# Altium PCB SPT3G_LCBoard.PcbDoc
Units mil, origin at the board's own origin, x right, y up, seen from the top; angles counter-clockwise.
Board outline 6750 x 1969 mil, 6 copper layers (Top Layer, Signal Layer 1, Internal Plane 1, Internal Plane 2, Signal Layer 2, Bottom Layer), stack 48.468 mil thick; 44 components, 140 nets, 688 pads, 138 vias.
Unrouted connection lines stored in the file: 204.
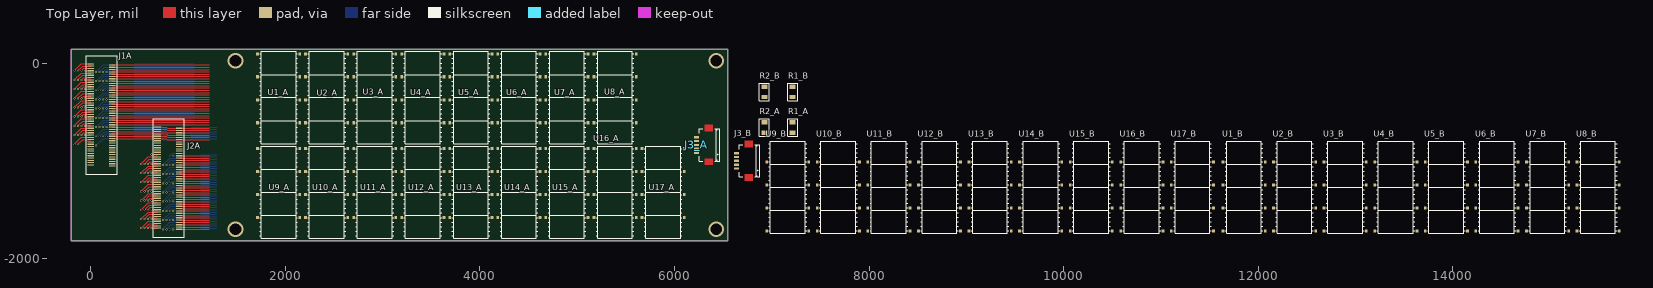
[diagram p0: Top Layer view]
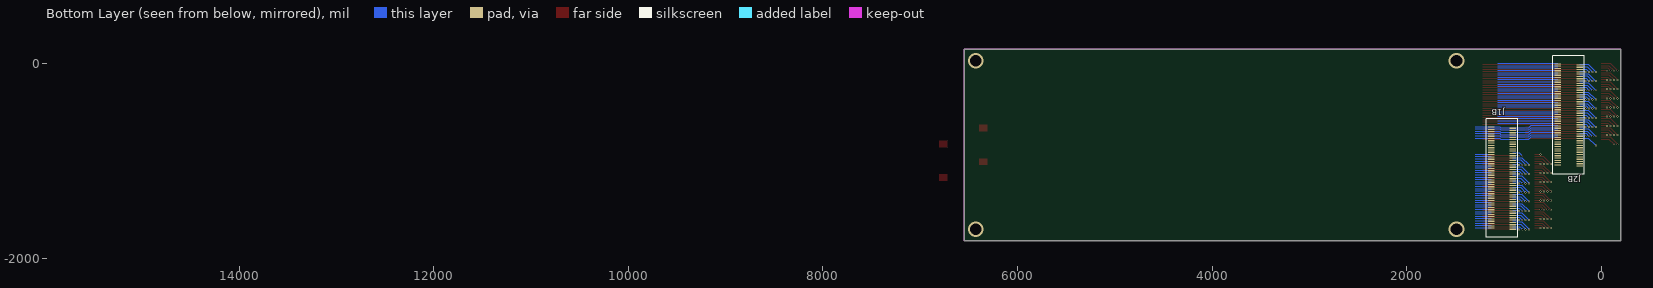
[diagram p1: Bottom Layer view, seen from below]
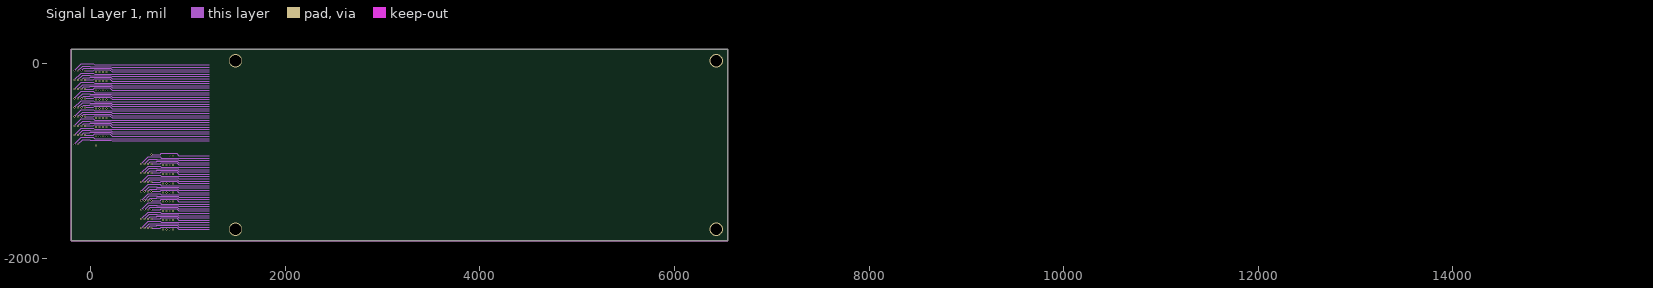
[diagram p2: Signal Layer 1]
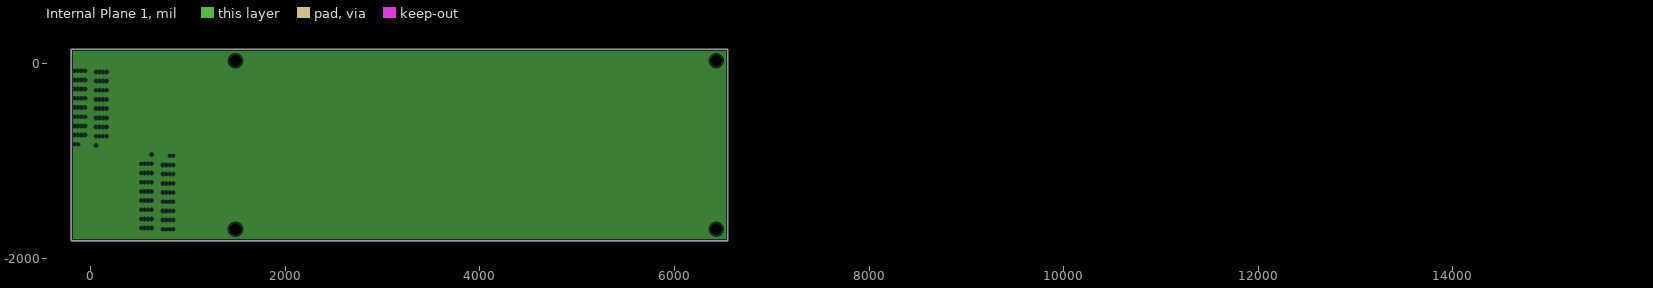
[diagram p3: Internal Plane 1, clearances drawn from the general rule]
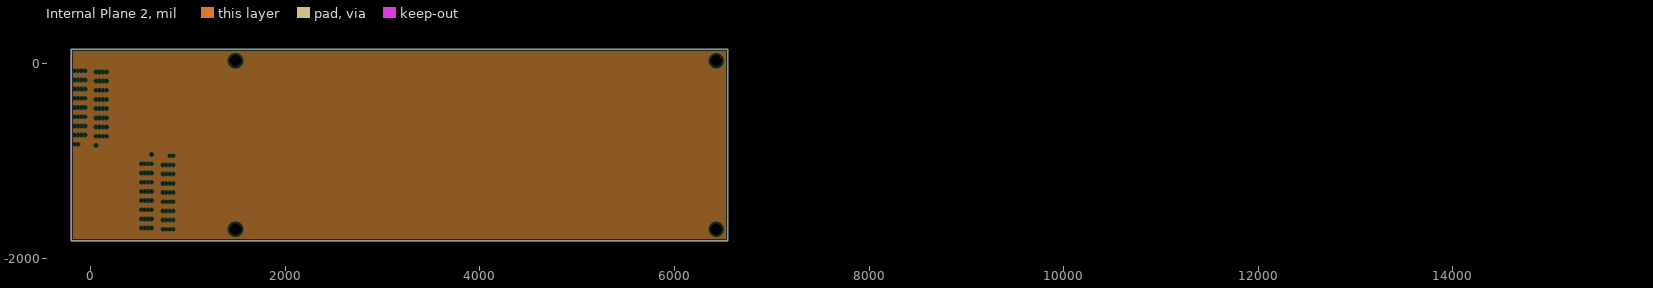
[diagram p4: Internal Plane 2, clearances drawn from the general rule]
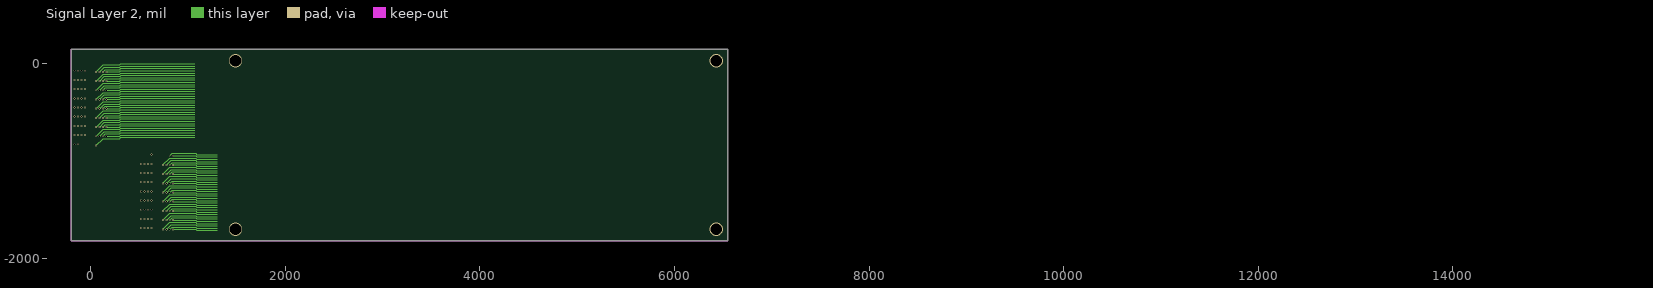
[diagram p5: Signal Layer 2]

## Layer stack, top to bottom
Top Solder: solder mask 0.4, Solder Resist, Dk 3.5
Top Layer: signal copper 1.4
Dielectric 1: core 10, FR-4, Dk 4.2
Signal Layer 1: signal copper 1.417
Dielectric 3: prepreg 5, Dk 4.2
Internal Plane 1: plane copper 1.417
Dielectric 4: core 10, Dk 4.2
Internal Plane 2: plane copper 1.417
Dielectric 5: prepreg 5, Dk 4.2
Signal Layer 2: signal copper 1.417
Dielectric 2: core 10, Dk 4.2
Bottom Layer: signal copper 1.4
Bottom Solder: solder mask 0.4, Solder Resist, Dk 3.5

## Board outline
-201.1,-1818.5 -201.1,150.5 6548.9,150.5 6548.9,-1818.5

## Design rules (kind name [scope] priority, off if disabled: settings)
Clearance [All] p1: gap=6
PlaneClearance [All] p1: clearance=20
PlaneConnect [All] p1: planeconnectstyle=Relief reliefexpansion=20 reliefentries=4 reliefconductorwidth=10 reliefairgap=10
PolygonConnect [All] p1: connectstyle=Relief reliefconductorwidth=10 reliefentries=4 polygonreliefangle="90 Angle" airgapwidth=10
RoomDefinition B [InComponentClass('B')] p1: confinementstyle=ConfineIn formatcopy=TRUE lockcomponents=FALSE outline 6593.9,-1758.72 15733.9,-1758.72 15733.9,-666.2 6593.9,-666.2
RoutingVias [All] p1: holewidth=28 width=50 viastyle="Through Hole" minholewidth=28 minwidth=50 maxholewidth=28 maxwidth=50
SolderMaskExpansion [All] p1: expansion=4
UnpouredPolygon [All] p1: allowunpoured=FALSE
Width [All] p1: maxlimit=10 minlimit=5 preferedwidth=6
27 further rules are at their usual default settings.

## Classes and differential pairs
component class A: J3_A R1_A R2_A U1_A U2_A U3_A U4_A U5_A U6_A U7_A U8_A U9_A U10_A U11_A U12_A U13_A U14_A U15_A U16_A U17_A
component class B: J3_B R1_B R2_B U1_B U2_B U3_B U4_B U5_B U6_B U7_B U8_B U9_B U10_B U11_B U12_B U13_B U14_B U15_B U16_B U17_B
component class S1: J1A J2A
component class S2: J1B J2B
channel class LCs: A B

## Components (designator, comment, footprint, x,y, rotation, side; value= is the part's Value field where it differs from the comment)
J1A "ZIF Connector" LCBoard_ZIFCon#1 33.46,0 r270 top
J1B "ZIF Connector" LCBoard_ZIFCon#2 941.89,-1700.79 r90 bottom
J2A "ZIF Connector" LCBoard_ZIFCon#1 719.45,-649.61 r270 top
J2B "ZIF Connector" LCBoard_ZIFCon#2 255.91,-1051.18 r90 bottom
J3_A "FH-12-5S-1SH(55)" FH-12-5S-1SH(55) 6352.9,-833.5 r90 top (schematic designator J3)
J3_B "FH-12-5S-1SH(55)" FH-12-5S-1SH(55) 6763.9,-996.91 r90 top (schematic designator J3)
R1_A "Res1206" 1206 7213.9,-706.47 r90 top (schematic designator R1)
R1_B "Res1206" 1206 7213.9,-341.47 r90 top (schematic designator R1)
R2_A "Res1206" 1206 6923.9,-706.47 r90 top (schematic designator R2)
R2_B "Res1206" 1206 6923.9,-341.47 r90 top (schematic designator R2)
U1_A "LC_wafer" "LCCHIP4X2 - BondPads1" 1930.9,-345.91 r270 top (schematic designator U1)
U1_B "LC_wafer" "LCCHIP4X2 - BondPads1" 11853.9,-1268.56 r90 top (schematic designator U1)
U2_A "LC_wafer" "LCCHIP4X2 - BondPads1" 2424.9,-345.91 r270 top (schematic designator U2)
U2_B "LC_wafer" "LCCHIP4X2 - BondPads1" 12373.9,-1268.56 r90 top (schematic designator U2)
U3_A "LC_wafer" "LCCHIP4X2 - BondPads1" 2918.9,-345.91 r270 top (schematic designator U3)
U3_B "LC_wafer" "LCCHIP4X2 - BondPads1" 12893.9,-1268.56 r90 top (schematic designator U3)
U4_A "LC_wafer" "LCCHIP4X2 - BondPads1" 3412.9,-345.91 r270 top (schematic designator U4)
U4_B "LC_wafer" "LCCHIP4X2 - BondPads1" 13413.9,-1268.56 r90 top (schematic designator U4)
U5_A "LC_wafer" "LCCHIP4X2 - BondPads1" 3906.9,-345.91 r270 top (schematic designator U5)
U5_B "LC_wafer" "LCCHIP4X2 - BondPads1" 13933.9,-1268.56 r90 top (schematic designator U5)
U6_A "LC_wafer" "LCCHIP4X2 - BondPads1" 4400.9,-345.91 r270 top (schematic designator U6)
U6_B "LC_wafer" "LCCHIP4X2 - BondPads1" 14453.9,-1268.56 r90 top (schematic designator U6)
U7_A "LC_wafer" "LCCHIP4X2 - BondPads1" 4894.9,-345.91 r270 top (schematic designator U7)
U7_B "LC_wafer" "LCCHIP4X2 - BondPads1" 14973.9,-1268.56 r90 top (schematic designator U7)
U8_A "LC_wafer" "LCCHIP4X2 - BondPads1" 5388.9,-345.91 r270 top (schematic designator U8)
U8_B "LC_wafer" "LCCHIP4X2 - BondPads1" 15493.9,-1268.56 r90 top (schematic designator U8)
U9_A "LC_wafer" "LCCHIP4X2 - BondPads1" 1930.9,-1319.5 r270 top (schematic designator U9)
U9_B "LC_wafer" "LCCHIP4X2 - BondPads1" 7163.9,-1268.56 r90 top (schematic designator U9)
U10_A "LC_wafer" "LCCHIP4X2 - BondPads1" 2424.9,-1319.5 r270 top (schematic designator U10)
U10_B "LC_wafer" "LCCHIP4X2 - BondPads1" 7683.9,-1268.56 r90 top (schematic designator U10)
U11_A "LC_wafer" "LCCHIP4X2 - BondPads1" 2918.9,-1319.5 r270 top (schematic designator U11)
U11_B "LC_wafer" "LCCHIP4X2 - BondPads1" 8203.9,-1268.56 r90 top (schematic designator U11)
U12_A "LC_wafer" "LCCHIP4X2 - BondPads1" 3412.9,-1319.5 r270 top (schematic designator U12)
U12_B "LC_wafer" "LCCHIP4X2 - BondPads1" 8723.9,-1268.56 r90 top (schematic designator U12)
U13_A "LC_wafer" "LCCHIP4X2 - BondPads1" 3906.9,-1319.5 r270 top (schematic designator U13)
U13_B "LC_wafer" "LCCHIP4X2 - BondPads1" 9243.9,-1268.56 r90 top (schematic designator U13)
U14_A "LC_wafer" "LCCHIP4X2 - BondPads1" 4400.9,-1319.5 r270 top (schematic designator U14)
U14_B "LC_wafer" "LCCHIP4X2 - BondPads1" 9763.9,-1268.56 r90 top (schematic designator U14)
U15_A "LC_wafer" "LCCHIP4X2 - BondPads1" 4894.9,-1319.5 r270 top (schematic designator U15)
U15_B "LC_wafer" "LCCHIP4X2 - BondPads1" 10283.9,-1268.56 r90 top (schematic designator U15)
U16_A "LC_wafer" "LCCHIP4X2 - BondPads1" 5388.9,-1319.5 r270 top (schematic designator U16)
U16_B "LC_wafer" "LCCHIP4X2 - BondPads1" 10803.9,-1268.56 r90 top (schematic designator U16)
U17_A "LC_wafer" "LCCHIP4X2 - BondPads1" 5882.9,-1319.5 r270 top (schematic designator U17)
U17_B "LC_wafer" "LCCHIP4X2 - BondPads1" 11323.9,-1268.56 r90 top (schematic designator U17)

## Footprints (in the part's own frame and the unit in brackets; to place one, negate y for a bottom-side part, rotate by r counter-clockwise, add the part's x,y. Pads: shape width x height; smd on the part's side, far side on the other; paste and mask are expansions set on the pad)
1206 [mil]
  rect 45x60 smd: 1(0,0) 2(105,0)
  silkscreen extent -37,-51 144,51
FH-12-5S-1SH(55) [mil] "FH-12-5S-1SH(55)"
  rect 24x52 smd: 1(79,128) 2(40,128) 3(0,128) 4(-39.37,128) 5(-78.74,128)
  Top Layer region: 209,44 138,44 138,-43.31 209,-43.31
  Top Layer region: -137.8,44 -208.66,44 -208.66,-43.31 -137.8,-43.31
  silkscreen extent -165,-114 166,99
LCBoard_ZIFCon#1 [mm]
  rect 0.3x1.7 smd: 1(0,-0.85) 2(0.3,4.8) 3(0.6,-0.85) 4(0.9,4.8) 5(1.2,-0.85) 6(1.5,4.8) 7(1.8,-0.85) 8(2.1,4.8) 9(2.4,-0.85) 10(2.7,4.8) 11(3,-0.85) 12(3.3,4.8) 13(3.6,-0.85) 14(3.9,4.8) 15(4.2,-0.85) 16(4.5,4.8) 17(4.8,-0.85) 18(5.1,4.8) 19(5.4,-0.85) 20(5.7,4.8) 21(6,-0.85) 22(6.3,4.8) 23(6.6,-0.85) 24(6.9,4.8) 25(7.2,-0.85) 26(7.5,4.8) 27(7.8,-0.85) 28(8.1,4.8) 29(8.4,-0.85) 30(8.7,4.8) 31(9,-0.85) 32(9.3,4.8) 33(9.6,-0.85) 34(9.9,4.8) 35(10.2,-0.85) 36(10.5,4.8) 37(10.8,-0.85) 38(11.1,4.8) 39(11.4,-0.85) 40(11.7,4.8) 41(12,-0.85) 42(12.3,4.8) 43(12.6,-0.85) 44(12.9,4.8) 45(13.2,-0.85) 46(13.5,4.8) 47(13.8,-0.85) 48(14.1,4.8) 49(14.4,-0.85) 50(14.7,4.8) 51(15,-0.85) 52(15.3,4.8) 53(15.6,-0.85) 54(15.9,4.8) 55(16.2,-0.85) 56(16.5,4.8) 57(16.8,-0.85) 58(17.1,4.8) 59(17.4,-0.85) 60(17.7,4.8) 61(18,-0.85) 62(18.3,4.8) 63(18.6,-0.85) 64(18.9,4.8) 65(19.2,-0.85) 66(19.5,4.8) 67(19.8,-0.85) 68(20.1,4.8) 69(20.4,-0.85) 70(20.7,4.8) 71(21,-0.85) 72(21.3,4.8) 73(21.6,-0.85) 74(21.9,4.8) 75(22.2,-0.85) 76(22.5,4.8) 77(22.8,-0.85) 78(23.1,4.8) 79(23.4,-0.85) 80(23.7,4.8) 81(24,-0.85) 82(24.3,4.8) 83(24.6,-0.85) 84(24.9,4.8) 85(25.2,-0.85) 86(25.5,4.8) 87(25.8,-0.85) 88(26.1,4.8) 89(26.4,-0.85) 90(26.7,4.8)
  round 0.5 on Top Overlay: 2(-2.3,-2.4)
  silkscreen extent -2.1,-2.1 28.8,6.1
LCBoard_ZIFCon#2 [mm]
  rect 0.3x1.7 smd: 1(0,-0.85) 2(0.3,4.8) 3(0.6,-0.85) 4(0.9,4.8) 5(1.2,-0.85) 6(1.5,4.8) 7(1.8,-0.85) 8(2.1,4.8) 9(2.4,-0.85) 10(2.7,4.8) 11(3,-0.85) 12(3.3,4.8) 13(3.6,-0.85) 14(3.9,4.8) 15(4.2,-0.85) 16(4.5,4.8) 17(4.8,-0.85) 18(5.1,4.8) 19(5.4,-0.85) 20(5.7,4.8) 21(6,-0.85) 22(6.3,4.8) 23(6.6,-0.85) 24(6.9,4.8) 25(7.2,-0.85) 26(7.5,4.8) 27(7.8,-0.85) 28(8.1,4.8) 29(8.4,-0.85) 30(8.7,4.8) 31(9,-0.85) 32(9.3,4.8) 33(9.6,-0.85) 34(9.9,4.8) 35(10.2,-0.85) 36(10.5,4.8) 37(10.8,-0.85) 38(11.1,4.8) 39(11.4,-0.85) 40(11.7,4.8) 41(12,-0.85) 42(12.3,4.8) 43(12.6,-0.85) 44(12.9,4.8) 45(13.2,-0.85) 46(13.5,4.8) 47(13.8,-0.85) 48(14.1,4.8) 49(14.4,-0.85) 50(14.7,4.8) 51(15,-0.85) 52(15.3,4.8) 53(15.6,-0.85) 54(15.9,4.8) 55(16.2,-0.85) 56(16.5,4.8) 57(16.8,-0.85) 58(17.1,4.8) 59(17.4,-0.85) 60(17.7,4.8) 61(18,-0.85) 62(18.3,4.8) 63(18.6,-0.85) 64(18.9,4.8) 65(19.2,-0.85) 66(19.5,4.8) 67(19.8,-0.85) 68(20.1,4.8) 69(20.4,-0.85) 70(20.7,4.8) 71(21,-0.85) 72(21.3,4.8) 73(21.6,-0.85) 74(21.9,4.8) 75(22.2,-0.85) 76(22.5,4.8) 77(22.8,-0.85) 78(23.1,4.8) 79(23.4,-0.85) 80(23.7,4.8) 81(24,-0.85) 82(24.3,4.8) 83(24.6,-0.85) 84(24.9,4.8) 85(25.2,-0.85) 86(25.5,4.8) 87(25.8,-0.85) 88(26.1,4.8) 89(26.4,-0.85) 90(26.7,4.8)
  round 0.5 on Bottom Overlay: 2(-2.3,-2.4)
  silkscreen extent -2.1,-2.1 28.8,6.1
"LCCHIP4X2 - BondPads1" [mil] "LCCHIP4X2"
  round 20 on Top Overlay: 0(-474.41,-178.15)
  rect 32x28 smd: 1(-448.82,-216.9) 2(-212.6,-216.9) 3(24,-216.9) 4(260,-216.9) 5(260,217) 6(24,217) 7(-212.6,217) 8(-448.82,217)
  silkscreen extent -474,-194 475,194

## Part data
J1A J1B J2A J2B: library part LCboard_FH16-90S-0.3SHW(05)
R1_A R1_B R2_A R2_B: "Resistor"
U1_A U1_B U2_A U2_B U3_A U3_B U4_A U4_B U5_A U5_B U6_A U6_B U7_A U7_B U8_A U8_B U9_A U9_B U10_A U10_B U11_A U11_B U12_A U12_B U13_A U13_B U14_A U14_B U15_A U15_B U16_A U16_B U17_A U17_B: library part LCWafer, "Gold bonded integrated LC"

## Via types
v1: diameter 20, hole 10, Top Layer to Bottom Layer, 134 vias
v2: diameter 160/136/136/160 (per signal layer), hole 120, Top Layer to Bottom Layer, 4 vias

## Nets (pads, with @x,y where several pads share a name; then routed paths per layer and width w, separated by ;. In a path a pad name is that pad's centre, name@x,y a point inside that pad or via, vN(x,y) a via of type N, cw(c..) or ccw(c..) an arc to the next point about the centre after c; other vN are vias at no path point)
BOLORETURN_A: J1A.1 J1A.3 J1A.5 J1A.7 J1A.9 J1A.11 J1A.13 J1A.15 J1A.17 J1A.19 J1A.21 J1A.23 J1A.25 J1A.27 J1A.29 J1A.31 J1A.33 J1A.35 J1A.37 J1A.39 J1A.41 J1A.43 J1A.45 J1A.47 J1A.49 J1A.51 J1A.53 J1A.55 J1A.57 J1A.59 J1A.61 J1A.63 J1A.65 J2A.25 J2A.27 J2A.29 J2A.31 J2A.33 J2A.35 J2A.37 J2A.39 J2A.41 J2A.43 J2A.45 J2A.47 J2A.49 J2A.51 J2A.53 J2A.55 J2A.57 J2A.59 J2A.61 J2A.63 J2A.65 J2A.67 J2A.69 J2A.71 J2A.73 J2A.75 J2A.77 J2A.79 J2A.81 J2A.83 J2A.85 J2A.87 J2A.89 J3_A.2 R1_A.2 R2_A.2 | length 75432.1
  Top Layer w6: v1(-167.32,-826.77) -96.46,-755.91 J1A.65 ; v1(-167.32,-732.28) -96.46,-661.42 J1A.57 ; v1(-167.32,-637.8) -96.46,-566.93 J1A.49 ; v1(-167.32,-543.31) -96.46,-472.44 J1A.41 ; v1(-167.32,-448.82) -96.46,-377.95 J1A.33 ; v1(-167.32,-354.33) -96.46,-283.46 J1A.25 ; v1(-167.32,-259.84) -96.46,-188.98 J1A.17 ; v1(-167.32,-165.35) -96.46,-94.49 J1A.9 ; v1(-167.32,-70.87) -96.46,0 J1A.1 ; v1(-131.89,-732.28) -84.65,-685.04 J1A.59 ; v1(-131.89,-637.8) -84.65,-590.55 J1A.51 ; v1(-131.89,-543.31) -84.65,-496.06 J1A.43 ; v1(-131.89,-448.82) -84.65,-401.57 J1A.35 ; v1(-131.89,-354.33) -84.65,-307.09 J1A.27 ; v1(-131.89,-259.84) -84.65,-212.6 J1A.19 ; v1(-131.89,-165.35) -84.65,-118.11 J1A.11 ; v1(-131.89,-70.87) -84.65,-23.62 J1A.3 ; v1(-96.46,-732.28) -72.83,-708.66 J1A.61 ; v1(-96.46,-637.8) -72.83,-614.17 J1A.53 ; v1(-96.46,-543.31) -72.83,-519.69 J1A.45 ; v1(-96.46,-448.82) -72.83,-425.2 J1A.37 ; v1(-96.46,-354.33) -72.83,-330.71 J1A.29 ; v1(-96.46,-259.84) -72.83,-236.22 J1A.21 ; v1(-96.46,-165.35) -72.83,-141.73 J1A.13 ; v1(-96.46,-70.87) -72.83,-47.24 J1A.5 ; v1(-61.02,-732.28) J1A.63 ; v1(-61.02,-637.8) J1A.55 ; v1(-61.02,-543.31) J1A.47 ; v1(-61.02,-448.82) J1A.39 ; v1(-61.02,-354.33) J1A.31 ; v1(-61.02,-259.84) J1A.23 ; v1(-61.02,-165.35) J1A.15 ; v1(-61.02,-70.87) J1A.7 ; v1(518.66,-1688.98) 589.53,-1618.11 J2A.83 ; v1(518.66,-1594.49) 589.53,-1523.62 J2A.75 ; v1(518.66,-1500) 589.53,-1429.13 J2A.67 ; v1(518.66,-1405.51) 589.53,-1334.65 J2A.59 ; v1(518.66,-1311.02) 589.53,-1240.16 J2A.51 ; v1(518.66,-1216.54) 589.53,-1145.67 J2A.43 ; v1(518.66,-1122.05) 589.53,-1051.18 J2A.35 ; v1(518.66,-1027.56) 589.53,-956.69 J2A.27 ; v1(554.09,-1688.98) 601.34,-1641.73 J2A.85 ; v1(554.09,-1594.49) 601.34,-1547.24 J2A.77 ; v1(554.09,-1500) 601.34,-1452.76 J2A.69 ; v1(554.09,-1405.51) 601.34,-1358.27 J2A.61 ; v1(554.09,-1311.02) 601.34,-1263.78 J2A.53 ; v1(554.09,-1216.54) 601.34,-1169.29 J2A.45 ; v1(554.09,-1122.05) 601.34,-1074.8 J2A.37 ; v1(554.09,-1027.56) 601.34,-980.31 J2A.29 ; v1(589.53,-1688.98) 613.15,-1665.35 J2A.87 ; v1(589.53,-1594.49) 613.15,-1570.87 J2A.79 ; v1(589.53,-1500) 613.15,-1476.38 J2A.71 ; v1(589.53,-1405.51) 613.15,-1381.89 J2A.63 ; v1(589.53,-1311.02) 613.15,-1287.4 J2A.55 ; v1(589.53,-1216.54) 613.15,-1192.91 J2A.47 ; v1(589.53,-1122.05) 613.15,-1098.43 J2A.39 ; v1(589.53,-1027.56) 613.15,-1003.94 J2A.31 ; v1(624.96,-1688.98) J2A.89 ; v1(624.96,-1594.49) J2A.81 ; v1(624.96,-1500) J2A.73 ; v1(624.96,-1405.51) J2A.65 ; v1(624.96,-1311.02) J2A.57 ; v1(624.96,-1216.54) J2A.49 ; v1(624.96,-1122.05) J2A.41 ; v1(624.96,-1027.56) J2A.33 ; v1(624.96,-933.07) J2A.25
  Signal Layer 1 w6: v1(-167.32,-826.77) -96.46,-755.91 28.19,-755.91 40,-767.72 1220,-767.72 ; v1(-167.32,-732.28) -96.46,-661.42 28.19,-661.42 40,-673.23 1220,-673.23 ; v1(-167.32,-637.8) -96.46,-566.93 28.19,-566.93 40,-578.74 1220,-578.74 ; v1(-167.32,-543.31) -96.46,-472.44 28.19,-472.44 40,-484.25 1220,-484.25 ; v1(-167.32,-448.82) -96.46,-377.95 28.19,-377.95 40,-389.76 1220,-389.76 ; v1(-167.32,-354.33) -96.46,-283.46 28.19,-283.46 40,-295.28 1220,-295.28 ; v1(-167.32,-259.84) -96.46,-188.98 28.19,-188.98 40,-200.79 1220,-200.79 ; v1(-167.32,-165.35) -96.46,-94.49 28.19,-94.49 40,-106.3 1220,-106.3 ; v1(-167.32,-70.87) -96.46,0 28.19,0 40,-11.81 1220,-11.81 ; v1(-131.89,-732.28) -84.65,-685.04 -10,-685.04 -6.06,-688.98 212.13,-688.98 220,-696.85 1220,-696.85 ; v1(-131.89,-637.8) -84.65,-590.55 -10,-590.55 -6.06,-594.49 212.13,-594.49 220,-602.36 1220,-602.36 ; v1(-131.89,-543.31) -84.65,-496.06 -10,-496.06 -6.06,-500 212.13,-500 220,-507.87 1220,-507.87 ; v1(-131.89,-448.82) -84.65,-401.57 -10,-401.57 -6.06,-405.51 212.13,-405.51 220,-413.39 1220,-413.39 ; v1(-131.89,-354.33) -84.65,-307.09 -10,-307.09 -6.06,-311.02 212.13,-311.02 220,-318.9 1220,-318.9 ; v1(-131.89,-259.84) -84.65,-212.6 -10,-212.6 -6.06,-216.54 212.13,-216.54 220,-224.41 1220,-224.41 ; v1(-131.89,-165.35) -84.65,-118.11 -10,-118.11 -6.06,-122.05 212.13,-122.05 220,-129.92 1220,-129.92 ; v1(-131.89,-70.87) -84.65,-23.62 -10,-23.62 -6.06,-27.56 212.13,-27.56 220,-35.43 1220,-35.43 ; v1(-96.46,-732.28) -72.83,-708.66 -10,-708.66 -6.06,-704.72 204.25,-704.72 220,-720.47 1220,-720.47 ; v1(-96.46,-637.8) -72.83,-614.17 -10,-614.17 -6.06,-610.24 204.25,-610.24 220,-625.98 1220,-625.98 ; v1(-96.46,-543.31) -72.83,-519.69 -10,-519.69 -6.06,-515.75 204.25,-515.75 220,-531.5 1220,-531.5 ; v1(-96.46,-448.82) -72.83,-425.2 -10,-425.2 -6.06,-421.26 204.25,-421.26 220,-437.01 1220,-437.01 ; v1(-96.46,-354.33) -72.83,-330.71 -10,-330.71 -6.06,-326.77 204.25,-326.77 220,-342.52 1220,-342.52 ; v1(-96.46,-259.84) -72.83,-236.22 -10,-236.22 -6.06,-232.28 204.25,-232.28 220,-248.03 1220,-248.03 ; v1(-96.46,-165.35) -72.83,-141.73 -10,-141.73 -6.06,-137.8 204.25,-137.8 220,-153.54 1220,-153.54 ; v1(-96.46,-70.87) -72.83,-47.24 -10,-47.24 -6.06,-43.31 204.25,-43.31 220,-59.06 1220,-59.06 ; v1(-61.02,-732.28) 28.19,-732.28 40,-720.47 196.38,-720.47 220,-744.09 1220,-744.09 ; v1(-61.02,-637.8) 28.19,-637.8 40,-625.98 196.38,-625.98 220,-649.61 1220,-649.61 ; v1(-61.02,-543.31) 28.19,-543.31 40,-531.5 196.38,-531.5 220,-555.12 1220,-555.12 ; v1(-61.02,-448.82) 28.19,-448.82 40,-437.01 196.38,-437.01 220,-460.63 1220,-460.63 ; v1(-61.02,-354.33) 28.19,-354.33 40,-342.52 196.38,-342.52 220,-366.14 1220,-366.14 ; v1(-61.02,-259.84) 28.19,-259.84 40,-248.03 196.38,-248.03 220,-271.65 1220,-271.65 ; v1(-61.02,-165.35) 28.19,-165.35 40,-153.54 196.38,-153.54 220,-177.17 1220,-177.17 ; v1(-61.02,-70.87) 28.19,-70.87 40,-59.06 196.38,-59.06 220,-82.68 1220,-82.68 ; v1(518.66,-1688.98) 589.53,-1618.11 714.17,-1618.11 725.98,-1629.92 1220,-1629.92 ; v1(518.66,-1594.49) 589.53,-1523.62 714.17,-1523.62 725.98,-1535.43 1220,-1535.43 ; v1(518.66,-1500) 589.53,-1429.13 714.17,-1429.13 725.98,-1440.94 1220,-1440.95 ; v1(518.66,-1405.51) 589.53,-1334.65 714.17,-1334.65 725.98,-1346.46 1220,-1346.46 ; v1(518.66,-1311.02) 589.53,-1240.16 714.17,-1240.16 725.98,-1251.97 1220,-1251.97 ; v1(518.66,-1216.54) 589.53,-1145.67 714.17,-1145.67 725.98,-1157.48 1220,-1157.48 ; v1(518.66,-1122.05) 589.53,-1051.18 714.17,-1051.18 725.98,-1062.99 1220,-1062.99 ; v1(518.66,-1027.56) 589.53,-956.69 714.17,-956.69 725.98,-968.5 1220,-968.5 ; v1(554.09,-1688.98) 601.34,-1641.73 675.98,-1641.73 679.92,-1645.67 898.11,-1645.67 905.98,-1653.54 1220,-1653.54 ; v1(554.09,-1594.49) 601.34,-1547.24 675.98,-1547.24 679.92,-1551.18 898.11,-1551.18 905.98,-1559.06 1220,-1559.06 ; v1(554.09,-1500) 601.34,-1452.76 675.98,-1452.76 679.92,-1456.69 898.11,-1456.69 905.98,-1464.57 1220,-1464.57 ; v1(554.09,-1405.51) 601.34,-1358.27 675.98,-1358.27 679.92,-1362.2 898.11,-1362.2 905.98,-1370.08 1220,-1370.08 ; v1(554.09,-1311.02) 601.34,-1263.78 675.98,-1263.78 679.92,-1267.72 898.11,-1267.72 905.98,-1275.59 1220,-1275.59 ; v1(554.09,-1216.54) 601.34,-1169.29 675.98,-1169.29 679.92,-1173.23 898.11,-1173.23 905.98,-1181.1 1220,-1181.1 ; v1(554.09,-1122.05) 601.34,-1074.8 675.98,-1074.8 679.92,-1078.74 898.11,-1078.74 905.98,-1086.61 1220,-1086.61 ; v1(554.09,-1027.56) 601.34,-980.31 675.98,-980.31 679.92,-984.25 898.11,-984.25 905.98,-992.13 1220,-992.13 ; v1(589.53,-1688.98) 613.15,-1665.35 675.98,-1665.35 679.92,-1661.42 890.24,-1661.42 905.98,-1677.17 1220,-1677.17 ; v1(589.53,-1594.49) 613.15,-1570.87 675.98,-1570.87 679.92,-1566.93 890.24,-1566.93 905.98,-1582.68 1220,-1582.68 ; v1(589.53,-1500) 613.15,-1476.38 675.98,-1476.38 679.92,-1472.44 890.24,-1472.44 905.98,-1488.19 1220,-1488.19 ; v1(589.53,-1405.51) 613.15,-1381.89 675.98,-1381.89 679.92,-1377.95 890.24,-1377.95 905.98,-1393.7 1220,-1393.7 ; v1(589.53,-1311.02) 613.15,-1287.4 675.98,-1287.4 679.92,-1283.46 890.24,-1283.46 905.98,-1299.21 1220,-1299.21 ; v1(589.53,-1216.54) 613.15,-1192.91 675.98,-1192.91 679.92,-1188.98 890.24,-1188.98 905.98,-1204.72 1220,-1204.72 ; v1(589.53,-1122.05) 613.15,-1098.43 675.98,-1098.43 679.92,-1094.49 890.24,-1094.49 905.98,-1110.24 1220,-1110.24 ; v1(589.53,-1027.56) 613.15,-1003.94 675.98,-1003.94 679.92,-1000 890.24,-1000 905.98,-1015.75 1220,-1015.75 ; v1(624.96,-1688.98) 714.17,-1688.98 725.98,-1677.17 882.36,-1677.17 905.98,-1700.79 1220,-1700.79 ; v1(624.96,-1594.49) 714.17,-1594.49 725.98,-1582.68 882.36,-1582.68 905.98,-1606.3 1220,-1606.3 ; v1(624.96,-1500) 714.17,-1500 725.98,-1488.19 882.36,-1488.19 905.98,-1511.81 1220,-1511.81 ; v1(624.96,-1405.51) 714.17,-1405.51 725.98,-1393.7 882.36,-1393.7 905.98,-1417.32 1220,-1417.32 ; v1(624.96,-1311.02) 714.17,-1311.02 725.98,-1299.21 882.36,-1299.21 905.98,-1322.83 1220,-1322.83 ; v1(624.96,-1216.54) 714.17,-1216.54 725.98,-1204.72 882.36,-1204.72 905.98,-1228.35 1220,-1228.35 ; v1(624.96,-1122.05) 714.17,-1122.05 725.98,-1110.24 882.36,-1110.24 905.98,-1133.86 1220,-1133.86 ; v1(624.96,-1027.56) 714.17,-1027.56 725.98,-1015.75 882.36,-1015.75 905.98,-1039.37 1220,-1039.37 ; v1(624.96,-933.07) 714.17,-933.07 725.98,-921.26 882.36,-921.26 905.98,-944.88 1220,-944.88
BOLORETURN_B: J1B.1 J1B.3 J1B.5 J1B.7 J1B.9 J1B.11 J1B.13 J1B.15 J1B.17 J1B.19 J1B.21 J1B.23 J1B.25 J1B.27 J1B.29 J1B.31 J1B.33 J1B.35 J1B.37 J1B.39 J1B.41 J1B.43 J1B.45 J1B.47 J1B.49 J1B.51 J1B.53 J1B.55 J1B.57 J1B.59 J1B.61 J1B.63 J1B.65 J2B.25 J2B.27 J2B.29 J2B.31 J2B.33 J2B.35 J2B.37 J2B.39 J2B.41 J2B.43 J2B.45 J2B.47 J2B.49 J2B.51 J2B.53 J2B.55 J2B.57 J2B.59 J2B.61 J2B.63 J2B.65 J2B.67 J2B.69 J2B.71 J2B.73 J2B.75 J2B.77 J2B.79 J2B.81 J2B.83 J2B.85 J2B.87 J2B.89 J3_B.2 R1_B.2 R2_B.2 | length 58189.4
  Signal Layer 2 w6: v1(55.12,-838.58) 125.98,-767.72 298.19,-767.72 310,-755.91 1070,-755.91 ; v1(55.12,-744.09) 125.98,-673.23 298.19,-673.23 310,-661.42 1070,-661.42 ; v1(55.12,-649.61) 125.98,-578.74 298.19,-578.74 310,-566.93 1070,-566.93 ; v1(55.12,-555.12) 125.98,-484.25 298.19,-484.25 310,-472.44 1070,-472.44 ; v1(55.12,-460.63) 125.98,-389.76 298.19,-389.76 310,-377.95 1070,-377.95 ; v1(55.12,-366.14) 125.98,-295.28 298.19,-295.28 310,-283.46 1070,-283.46 ; v1(55.12,-271.65) 125.98,-200.79 298.19,-200.79 310,-188.98 1070,-188.98 ; v1(55.12,-177.17) 125.98,-106.3 298.19,-106.3 310,-94.49 1070,-94.49 ; v1(55.12,-82.68) 125.98,-11.81 298.19,-11.81 310,0 1070,0 ; v1(90.55,-177.17) 92.76,-177.17 140,-129.92 302.28,-129.92 314.09,-118.11 1070,-118.11 ; v1@92.76,-744.09 140,-696.85 298.19,-696.85 310,-685.04 1070,-685.04 ; v1@92.76,-649.61 140,-602.36 298.19,-602.36 310,-590.55 1070,-590.55 ; v1@92.76,-555.12 140,-507.87 298.19,-507.87 310,-496.06 1070,-496.06 ; v1@92.76,-460.63 140,-413.39 298.19,-413.39 310,-401.58 1070,-401.58 ; v1@92.76,-366.14 140,-318.9 298.19,-318.9 310,-307.09 1070,-307.09 ; v1@92.76,-271.65 140,-224.41 298.19,-224.41 310,-212.6 1070,-212.6 ; v1@92.76,-82.68 140,-35.43 298.19,-35.43 310,-23.62 1070,-23.62 ; v1(125.98,-744.09) 149.61,-720.47 298.19,-720.47 310,-708.66 1070,-708.66 ; v1(125.98,-649.61) 149.61,-625.98 298.19,-625.98 310,-614.17 1070,-614.17 ; v1(125.98,-555.12) 149.61,-531.5 298.19,-531.5 310,-519.69 1070,-519.69 ; v1(125.98,-460.63) 149.61,-437.01 298.19,-437.01 310,-425.2 1070,-425.2 ; v1(125.98,-366.14) 149.61,-342.52 298.19,-342.52 310,-330.71 1070,-330.71 ; v1(125.98,-271.65) 149.61,-248.03 298.19,-248.03 310,-236.22 1070,-236.22 ; v1(125.98,-177.17) 149.61,-153.54 298.19,-153.54 310,-141.73 1070,-141.73 ; v1(125.98,-82.68) 149.61,-59.06 298.19,-59.06 310,-47.24 1070,-47.24 ; v1(161.42,-744.09) 298.19,-744.09 310,-732.28 1070,-732.28 ; v1(161.42,-649.61) 298.19,-649.61 310,-637.8 1070,-637.8 ; v1(161.42,-555.12) 298.19,-555.12 310,-543.31 1070,-543.31 ; v1(161.42,-460.63) 298.19,-460.63 310,-448.82 1070,-448.82 ; v1(161.42,-366.14) 298.19,-366.14 310,-354.33 1070,-354.33 ; v1(161.42,-271.65) 298.19,-271.65 310,-259.84 1070,-259.84 ; v1(161.42,-177.17) 298.19,-177.17 310,-165.35 1070,-165.35 ; v1(161.42,-82.68) 298.19,-82.68 310,-70.87 1070,-70.87 ; v1(741.1,-1700.79) 811.97,-1629.92 1078.19,-1629.92 1090,-1641.73 1300,-1641.73 ; v1(741.1,-1606.3) 811.97,-1535.43 1078.19,-1535.43 1090,-1547.24 1300,-1547.24 ; v1(741.1,-1511.81) 811.97,-1440.94 1078.19,-1440.94 1090,-1452.76 1300,-1452.76 ; v1(741.1,-1417.32) 811.97,-1346.46 1078.19,-1346.46 1090,-1358.27 1300,-1358.27 ; v1(741.1,-1322.83) 811.97,-1251.97 1078.19,-1251.97 1090,-1263.78 1300,-1263.78 ; v1(741.1,-1228.35) 811.97,-1157.48 1078.19,-1157.48 1090,-1169.29 1300,-1169.29 ; v1(741.1,-1133.86) 811.97,-1062.99 1078.19,-1062.99 1090,-1074.8 1300,-1074.8 ; v1(741.1,-1039.37) 811.97,-968.5 1078.19,-968.5 1090,-980.32 1300,-980.32 ; v1@778.74,-1700.79 825.98,-1653.54 1078.19,-1653.54 1090,-1665.35 1300,-1665.35 ; v1@778.74,-1606.3 825.98,-1559.06 1078.19,-1559.06 1090,-1570.87 1300,-1570.87 ; v1@778.74,-1511.81 825.98,-1464.57 1078.19,-1464.57 1090,-1476.38 1300,-1476.38 ; v1@778.74,-1417.32 825.98,-1370.08 1078.19,-1370.08 1090,-1381.89 1300,-1381.89 ; v1@778.74,-1322.83 825.98,-1275.59 1078.19,-1275.59 1090,-1287.4 1300,-1287.4 ; v1@778.74,-1228.35 825.98,-1181.1 1078.19,-1181.1 1090,-1192.91 1300,-1192.91 ; v1@778.74,-1133.86 825.98,-1086.61 1078.19,-1086.61 1090,-1098.43 1300,-1098.43 ; v1@778.74,-1039.37 825.98,-992.13 1078.19,-992.13 1090,-1003.94 1300,-1003.94 ; v1(811.97,-1700.79) 835.59,-1677.17 1078.19,-1677.17 1090,-1688.98 1300,-1688.98 ; v1(811.97,-1606.3) 835.59,-1582.68 1078.19,-1582.68 1090,-1594.49 1300,-1594.49 ; v1(811.97,-1511.81) 835.59,-1488.19 1078.19,-1488.19 1090,-1500 1300,-1500 ; v1(811.97,-1417.32) 835.59,-1393.7 1078.19,-1393.7 1090,-1405.51 1300,-1405.51 ; v1(811.97,-1322.83) 835.59,-1299.21 1078.19,-1299.21 1090,-1311.02 1300,-1311.02 ; v1(811.97,-1228.35) 835.59,-1204.72 1078.19,-1204.72 1090,-1216.54 1300,-1216.54 ; v1(811.97,-1133.86) 835.59,-1110.24 1078.19,-1110.24 1090,-1122.05 1300,-1122.05 ; v1(811.97,-1039.37) 835.59,-1015.75 1078.19,-1015.75 1090,-1027.56 1300,-1027.56 ; v1(847.4,-1700.79) 1078.19,-1700.79 1090,-1712.6 1300,-1712.6 ; v1(847.4,-1606.3) 1078.19,-1606.3 1090,-1618.11 1300,-1618.11 ; v1(847.4,-1511.81) 1078.19,-1511.81 1090,-1523.62 1300,-1523.62 ; v1(847.4,-1417.32) 1078.19,-1417.32 1090,-1429.13 1300,-1429.13 ; v1(847.4,-1322.83) 1078.19,-1322.83 1090,-1334.65 1300,-1334.65 ; v1(847.4,-1228.35) 1078.19,-1228.35 1090,-1240.16 1300,-1240.16 ; v1(847.4,-1133.86) 1078.19,-1133.86 1090,-1145.67 1300,-1145.67 ; v1(847.4,-1039.37) 1078.19,-1039.37 1090,-1051.18 1300,-1051.18 ; v1(847.4,-944.88) 1078.19,-944.88 1090,-956.69 1300,-956.69
  Bottom Layer w6: v1(55.12,-838.58) 125.98,-767.72 J2B.25 ; v1(55.12,-744.09) 125.98,-673.23 J2B.33 ; v1(55.12,-649.61) 125.98,-578.74 J2B.41 ; v1(55.12,-555.12) 125.98,-484.25 J2B.49 ; v1(55.12,-460.63) 125.98,-389.76 J2B.57 ; v1(55.12,-366.14) 125.98,-295.28 J2B.65 ; v1(55.12,-271.65) 125.98,-200.79 J2B.73 ; v1(55.12,-177.17) 125.98,-106.3 J2B.81 ; v1(55.12,-82.68) 125.98,-11.81 J2B.89 ; v1(90.55,-744.09) 137.8,-696.85 J2B.31 ; v1(90.55,-649.61) 137.8,-602.36 J2B.39 ; v1(90.55,-555.12) 137.8,-507.87 J2B.47 ; v1(90.55,-460.63) 137.8,-413.39 J2B.55 ; v1(90.55,-366.14) 137.8,-318.9 J2B.63 ; v1(90.55,-271.65) 137.8,-224.41 J2B.71 ; v1(90.55,-177.17) 137.8,-129.92 J2B.79 ; v1(90.55,-82.68) 137.8,-35.43 J2B.87 ; v1(125.98,-744.09) 149.61,-720.47 J2B.29 ; v1(125.98,-649.61) 149.61,-625.98 J2B.37 ; v1(125.98,-555.12) 149.61,-531.5 J2B.45 ; v1(125.98,-460.63) 149.61,-437.01 J2B.53 ; v1(125.98,-366.14) 149.61,-342.52 J2B.61 ; v1(125.98,-271.65) 149.61,-248.03 J2B.69 ; v1(125.98,-177.17) 149.61,-153.54 J2B.77 ; v1(125.98,-82.68) 149.61,-59.06 J2B.85 ; v1(161.42,-744.09) J2B.27 ; v1(161.42,-649.61) J2B.35 ; v1(161.42,-555.12) J2B.43 ; v1(161.42,-460.63) J2B.51 ; v1(161.42,-366.14) J2B.59 ; v1(161.42,-271.65) J2B.67 ; v1(161.42,-177.17) J2B.75 ; v1(161.42,-82.68) J2B.83 ; v1(741.1,-1700.79) 811.97,-1629.92 J1B.7 ; v1(741.1,-1606.3) 811.97,-1535.43 J1B.15 ; v1(741.1,-1511.81) 811.97,-1440.94 J1B.23 ; v1(741.1,-1417.32) 811.97,-1346.46 J1B.31 ; v1(741.1,-1322.83) 811.97,-1251.97 J1B.39 ; v1(741.1,-1228.35) 811.97,-1157.48 J1B.47 ; v1(741.1,-1133.86) 811.97,-1062.99 J1B.55 ; v1(741.1,-1039.37) 811.97,-968.5 J1B.63 ; v1(776.54,-1700.79) 823.78,-1653.54 J1B.5 ; v1(776.54,-1606.3) 823.78,-1559.06 J1B.13 ; v1(776.54,-1511.81) 823.78,-1464.57 J1B.21 ; v1(776.54,-1417.32) 823.78,-1370.08 J1B.29 ; v1(776.54,-1322.83) 823.78,-1275.59 J1B.37 ; v1(776.54,-1228.35) 823.78,-1181.1 J1B.45 ; v1(776.54,-1133.86) 823.78,-1086.61 J1B.53 ; v1(776.54,-1039.37) 823.78,-992.13 J1B.61 ; v1(811.97,-1700.79) 835.59,-1677.17 J1B.3 ; v1(811.97,-1606.3) 835.59,-1582.68 J1B.11 ; v1(811.97,-1511.81) 835.59,-1488.19 J1B.19 ; v1(811.97,-1417.32) 835.59,-1393.7 J1B.27 ; v1(811.97,-1322.83) 835.59,-1299.21 J1B.35 ; v1(811.97,-1228.35) 835.59,-1204.72 J1B.43 ; v1(811.97,-1133.86) 835.59,-1110.24 J1B.51 ; v1(811.97,-1039.37) 835.59,-1015.75 J1B.59 ; v1(847.4,-1700.79) J1B.1 ; v1(847.4,-1606.3) J1B.9 ; v1(847.4,-1511.81) J1B.17 ; v1(847.4,-1417.32) J1B.25 ; v1(847.4,-1322.83) J1B.33 ; v1(847.4,-1228.35) J1B.41 ; v1(847.4,-1133.86) J1B.49 ; v1(847.4,-1039.37) J1B.57 ; v1(847.4,-944.88) J1B.65
COMB_A: J3_A.1 U1_A.5 U1_A.6 U1_A.7 U1_A.8 U2_A.5 U2_A.6 U2_A.7 U2_A.8 U3_A.5 U3_A.6 U3_A.7 U3_A.8 U4_A.5 U4_A.6 U4_A.7 U4_A.8 U5_A.5 U5_A.6 U5_A.7 U5_A.8 U6_A.5 U6_A.6 U6_A.7 U6_A.8 U7_A.5 U7_A.6 U7_A.7 U7_A.8 U8_A.5 U8_A.6 U8_A.7 U8_A.8 U9_A.5 U9_A.6 U9_A.7 U9_A.8 U10_A.5 U10_A.6 U10_A.7 U10_A.8 U11_A.5 U11_A.6 U11_A.7 U11_A.8 U12_A.5 U12_A.6 U12_A.7 U12_A.8 U13_A.5 U13_A.6 U13_A.7 U13_A.8 U14_A.5 U14_A.6 U14_A.7 U14_A.8 U15_A.5 U15_A.6 U15_A.7 U15_A.8 U16_A.5 U16_A.6 U16_A.7 U16_A.8 U17_A.5 U17_A.6 U17_A.7 U17_A.8
COMB_B: J3_B.1 U1_B.5 U1_B.6 U1_B.7 U1_B.8 U2_B.5 U2_B.6 U2_B.7 U2_B.8 U3_B.5 U3_B.6 U3_B.7 U3_B.8 U4_B.5 U4_B.6 U4_B.7 U4_B.8 U5_B.5 U5_B.6 U5_B.7 U5_B.8 U6_B.5 U6_B.6 U6_B.7 U6_B.8 U7_B.5 U7_B.6 U7_B.7 U7_B.8 U8_B.5 U8_B.6 U8_B.7 U8_B.8 U9_B.5 U9_B.6 U9_B.7 U9_B.8 U10_B.5 U10_B.6 U10_B.7 U10_B.8 U11_B.5 U11_B.6 U11_B.7 U11_B.8 U12_B.5 U12_B.6 U12_B.7 U12_B.8 U13_B.5 U13_B.6 U13_B.7 U13_B.8 U14_B.5 U14_B.6 U14_B.7 U14_B.8 U15_B.5 U15_B.6 U15_B.7 U15_B.8 U16_B.5 U16_B.6 U16_B.7 U16_B.8 U17_B.5 U17_B.6 U17_B.7 U17_B.8
FREQA0: J2A.90 U9_A.4 | length 308.9
  Top Layer w6: J2A.90 1217.32,-1700.79
FREQA1: J1A.60 J2A.5 J2A.6 U1_A.4 | length 999.8
  Top Layer w6: J1A.60 J2A.5 777.32,-696.85 789.13,-708.66 J2A.6 1217.32,-708.66
FREQA2: J2A.54 U9_A.2 | length 308.9
  Top Layer w6: J2A.54 1217.32,-1275.59
FREQA3: J1A.32 U1_A.2 | length 994.9
  Top Layer w6: J1A.32 1217.32,-366.14
FREQA4: J2A.88 U11_A.4 | length 308.9
  Top Layer w6: J2A.88 1217.32,-1677.17
FREQA5: J1A.58 J2A.3 J2A.4 U3_A.4 | length 999.8
  Top Layer w6: J1A.58 J2A.3 777.32,-673.23 789.13,-685.04 J2A.4 1217.32,-685.04
FREQA6: J2A.52 U11_A.2 | length 308.9
  Top Layer w6: J2A.52 1217.32,-1251.97
FREQA7: J1A.24 U3_A.2 | length 994.9
  Top Layer w6: J1A.24 1217.32,-271.65
FREQA8: J2A.86 U13_A.4 | length 308.9
  Top Layer w6: J2A.86 1217.32,-1653.54
FREQA9: J1A.56 J2A.1 J2A.2@908.43,-661.42 U5_A.4 | length 999.8
  Top Layer w6: J1A.56 J2A.1 777.32,-649.61 789.13,-661.42 908.43,-661.42 1217.32,-661.42
FREQA10: J2A.50 U13_A.2 | length 308.9
  Top Layer w6: J2A.50 1217.32,-1228.35
FREQA11: J1A.8 U6_A.1 | length 997.6
  Top Layer w6: J1A.8 1220,-82.68
FREQA12: J2A.78 U15_A.4 | length 308.9
  Top Layer w6: J2A.78 1217.32,-1559.05
FREQA13: J1A.48 U7_A.4 | length 994.9
  Top Layer w6: J1A.48 1217.32,-555.12
FREQA14: J2A.42 U15_A.2 | length 308.9
  Top Layer w6: J2A.42 1217.32,-1133.86
FREQA15: J1A.64 J2A.9 J2A.10 U14_A.1 | length 999.8
  Top Layer w6: J1A.64 J2A.9 777.32,-744.09 789.13,-755.91 J2A.10 1217.32,-755.91
FREQA16: J2A.76 U17_A.4 | length 308.9
  Top Layer w6: J2A.76 1217.32,-1535.43
FREQA17: J1A.36 U8_A.3 | length 994.9
  Top Layer w6: J1A.36 1217.32,-413.39
FREQA18: J2A.40 U17_A.2 | length 308.9
  Top Layer w6: J2A.40 1217.32,-1110.24
FREQA19: J1A.10 U4_A.1 | length 994.9
  Top Layer w6: J1A.10 384.25,-106.3 1217.32,-106.3
FREQA20: J2A.60 U16_A.3 | length 308.9
  Top Layer w6: J2A.60 1217.32,-1346.46
FREQA21: J1A.34 U6_A.3 | length 994.9
  Top Layer w6: J1A.34 384.25,-389.76 1217.32,-389.76
FREQA22: J1A.66 J2A.11 J2A.12 U16_A.1 | length 999.8
  Top Layer w6: J1A.66 J2A.11 777.32,-767.72 789.13,-779.53 J2A.12 1217.32,-779.53
FREQA23: J2A.74 U9_A.3 | length 308.9
  Top Layer w6: J2A.74 1217.32,-1511.81
FREQA24: J1A.12 U2_A.1 | length 994.9
  Top Layer w6: J1A.12 1217.32,-129.92
FREQA25: J1A.44 U4_A.3 | length 994.9
  Top Layer w6: J1A.44 1217.32,-507.87
FREQA26: J2A.38 U9_A.1 | length 308.9
  Top Layer w6: J2A.38 1217.32,-1086.61
FREQA27: J2A.66 U11_A.3 | length 308.9
  Top Layer w6: J2A.66 1217.32,-1417.32
FREQA28: J1A.20 U7_A.2 | length 994.9
  Top Layer w6: J1A.20 1217.32,-224.41
FREQA29: J1A.46 U2_A.3 | length 994.9
  Top Layer w6: J1A.46 384.25,-531.5 1217.32,-531.5
FREQA30: J2A.30 U11_A.1 | length 308.9
  Top Layer w6: J2A.30 1217.32,-992.13
FREQA31: J2A.64 U13_A.3 | length 308.9
  Top Layer w6: J2A.64 1217.32,-1393.7
FREQA32: J1A.22 U5_A.2 | length 994.9
  Top Layer w6: J1A.22 384.25,-248.03 1217.32,-248.03
FREQA33: R2_A.1 U8_A.1
FREQA34: J2A.80 U10_A.4 | length 308.9
  Top Layer w6: J2A.80 1217.32,-1582.68
FREQA35: J1A.50 U2_A.4 | length 994.9
  Top Layer w6: J1A.50 1217.32,-578.74
FREQA36: J2A.44 U10_A.2 | length 308.9
  Top Layer w6: J2A.44 1217.32,-1157.48
FREQA37: J1A.30 U2_A.2 | length 994.9
  Top Layer w6: J1A.30 1217.32,-342.52
FREQA38: J2A.82 U12_A.4 | length 308.9
  Top Layer w6: J2A.82 1217.32,-1606.3
FREQA39: J1A.52 U4_A.4 | length 994.9
  Top Layer w6: J1A.52 384.25,-602.36 1217.32,-602.36
FREQA40: J2A.46 U12_A.2 | length 308.9
  Top Layer w6: J2A.46 1217.32,-1181.1
FREQA41: J1A.14 U4_A.2 | length 994.9
  Top Layer w6: J1A.14 1217.32,-153.54
FREQA42: J2A.84 U14_A.4 | length 308.9
  Top Layer w6: J2A.84 1217.32,-1629.92
FREQA43: J1A.54 U6_A.4 | length 994.9
  Top Layer w6: J1A.54 1217.32,-625.98
FREQA44: J2A.48 U14_A.2 | length 308.9
  Top Layer w6: J2A.48 1217.32,-1204.72
FREQA45: J1A.6 U5_A.1 | length 994.9
  Top Layer w6: J1A.6 1217.32,-59.06
FREQA46: J2A.62 U15_A.3 | length 308.9
  Top Layer w6: J2A.62 1217.32,-1370.08
FREQA47: J1A.42 U8_A.4 | length 994.9
  Top Layer w6: J1A.42 1217.32,-484.25
FREQA48: J2A.34 U16_A.2 | length 308.9
  Top Layer w6: J2A.34 1217.32,-1039.37
FREQA49: J2A.28 U13_A.1 | length 308.9
  Top Layer w6: J2A.28 1217.32,-968.5
FREQA50: J2A.70 U16_A.4 | length 308.9
  Top Layer w6: J2A.70 1217.32,-1464.57
FREQA51: J1A.26 U7_A.3 | length 994.9
  Top Layer w6: J1A.26 1217.32,-295.28
FREQA52: J2A.26 U15_A.1 | length 308.9
  Top Layer w6: J2A.26 1217.32,-944.88
FREQA53: J1A.4 U3_A.1 | length 994.9
  Top Layer w6: J1A.4 384.25,-35.43 1217.32,-35.43
FREQA54: J2A.68 U17_A.3 | length 308.9
  Top Layer w6: J2A.68 1217.32,-1440.94
FREQA55: J1A.28 U5_A.3 | length 994.9
  Top Layer w6: J1A.28 384.25,-318.9 1217.32,-318.9
FREQA56: J2A.32 U17_A.1 | length 308.9
  Top Layer w6: J2A.32 1217.32,-1015.75
FREQA57: J2A.72 U10_A.3 | length 308.9
  Top Layer w6: J2A.72 1217.32,-1488.19
FREQA58: J1A.2@222.44,-11.81 U1_A.1 | length 994.9
  Top Layer w6: J1A.2@222.44,-11.81 1217.32,-11.81
FREQA59: J1A.38 U3_A.3 | length 994.9
  Top Layer w6: J1A.38 1217.32,-437.01
FREQA60: J2A.36 U10_A.1 | length 308.9
  Top Layer w6: J2A.36 1217.32,-1062.99
FREQA61: J2A.56 U12_A.3 | length 308.9
  Top Layer w6: J2A.56 1217.32,-1299.21
FREQA62: J1A.18 U8_A.2 | length 994.9
  Top Layer w6: J1A.18 1217.32,-200.79
FREQA63: J1A.40 U1_A.3 | length 994.9
  Top Layer w6: J1A.40 384.25,-460.63 1217.32,-460.63
FREQA64: J1A.62 J2A.7 J2A.8 U12_A.1 | length 999.8
  Top Layer w6: J1A.62 J2A.7 777.32,-720.47 789.13,-732.28 J2A.8 1217.32,-732.28
FREQA65: J2A.58 U14_A.3 | length 308.9
  Top Layer w6: J2A.58 1217.32,-1322.83
FREQA66: J1A.16 U6_A.2 | length 994.9
  Top Layer w6: J1A.16 384.25,-177.17 1217.32,-177.17
FREQA67: R1_A.1 U7_A.1
FREQB0: J2B.90 U9_B.4 | length 620.9
  Bottom Layer w6: J2B.90 1065.83,0
FREQB1: J1B.60 U1_B.4 | length 165.4
  Bottom Layer w6: J1B.60 1296.22,-1003.94
FREQB2: J2B.54 U9_B.2 | length 620.9
  Bottom Layer w6: J2B.54 1065.83,-425.2
FREQB3: J1B.32 U1_B.2 | length 165.4
  Bottom Layer w6: J1B.32 1296.22,-1334.65
FREQB4: J2B.88 U11_B.4 | length 620.9
  Bottom Layer w6: J2B.88 1065.83,-23.62
FREQB5: J1B.58 U3_B.4 | length 165.4
  Bottom Layer w6: J1B.58 1296.22,-1027.56
FREQB6: J2B.52 U11_B.2 | length 620.9
  Bottom Layer w6: J2B.52 1065.83,-448.82
FREQB7: J1B.24 U3_B.2 | length 165.4
  Bottom Layer w6: J1B.24 1296.22,-1429.13
FREQB8: J2B.86 U13_B.4 | length 620.9
  Bottom Layer w6: J2B.86 1065.83,-47.24
FREQB9: J1B.56 U5_B.4 | length 165.4
  Bottom Layer w6: J1B.56 1296.22,-1051.18
FREQB10: J2B.50 U13_B.2
FREQB11: J1B.8 U6_B.1 | length 165.4
  Bottom Layer w6: J1B.8 1296.22,-1618.11
FREQB12: J2B.78 U15_B.4 | length 620.9
  Bottom Layer w6: J2B.78 1065.83,-141.73
FREQB13: J1B.48 U7_B.4 | length 165.4
  Bottom Layer w6: J1B.48 1296.22,-1145.67
FREQB14: J2B.42 U15_B.2 | length 620.9
  Bottom Layer w6: J2B.42 1065.83,-566.93
FREQB15: J1B.64 U14_B.1 | length 165.4
  Bottom Layer w6: J1B.64 1296.22,-956.69
FREQB16: J2B.76 U17_B.4 | length 620.9
  Bottom Layer w6: J2B.76 1065.83,-165.35
FREQB17: J1B.36 U8_B.3 | length 165.4
  Bottom Layer w6: J1B.36 1296.22,-1287.4
FREQB18: J2B.40 U17_B.2 | length 620.9
  Bottom Layer w6: J2B.40 1065.83,-590.55
FREQB19: J1B.10 U4_B.1 | length 165.4
  Bottom Layer w6: J1B.10 1296.22,-1594.49
FREQB20: J2B.60 U16_B.3 | length 620.9
  Bottom Layer w6: J2B.60 1065.83,-354.33
FREQB21: J1B.34 U6_B.3 | length 165.4
  Bottom Layer w6: J1B.34 1296.22,-1311.02
FREQB22: J1B.66 U16_B.1 | length 165.4
  Bottom Layer w6: J1B.66 1296.22,-933.07
FREQB23: J2B.74 U9_B.3 | length 620.9
  Bottom Layer w6: J2B.74 1065.83,-188.98
FREQB24: J1B.12 U2_B.1 | length 165.4
  Bottom Layer w6: J1B.12 1296.22,-1570.87
FREQB25: J1B.44 U4_B.3 | length 165.4
  Bottom Layer w6: J1B.44 1296.22,-1192.91
FREQB26: J2B.38 U9_B.1 | length 620.9
  Bottom Layer w6: J2B.38 1065.83,-614.17
FREQB27: J2B.66 U11_B.3 | length 620.9
  Bottom Layer w6: J2B.66 1065.83,-283.46
FREQB28: J1B.20 U7_B.2 | length 165.4
  Bottom Layer w6: J1B.20 1296.22,-1476.38
FREQB29: J1B.46 U2_B.3 | length 165.4
  Bottom Layer w6: J1B.46 1296.22,-1169.29
FREQB30: J1B.83 J1B.84 J2B.30 U11_B.1 | length 866
  Bottom Layer w6: J2B.30 726.61,-708.66 750.24,-732.28 J1B.83 1027.72,-732.28 1039.53,-720.47 J1B.84 1296.22,-720.47
FREQB31: J2B.64 U13_B.3 | length 620.9
  Bottom Layer w6: J2B.64 1065.83,-307.09
FREQB32: J1B.22 U5_B.2 | length 165.4
  Bottom Layer w6: J1B.22 1296.22,-1452.76
FREQB33: R2_B.1 U8_B.1
FREQB34: J2B.80 U10_B.4 | length 620.9
  Bottom Layer w6: J2B.80 1065.83,-118.11
FREQB35: J1B.50 U2_B.4 | length 165.4
  Bottom Layer w6: J1B.50 1296.22,-1122.05
FREQB36: J2B.44 U10_B.2 | length 620.9
  Bottom Layer w6: J2B.44 1065.83,-543.31
FREQB37: J1B.30 U2_B.2 | length 165.4
  Bottom Layer w6: J1B.30 1296.22,-1358.27
FREQB38: J2B.82 U12_B.4 | length 620.9
  Bottom Layer w6: J2B.82 1065.83,-94.49
FREQB39: J1B.52 U4_B.4 | length 165.4
  Bottom Layer w6: J1B.52 1296.22,-1098.43
FREQB40: J2B.46 U12_B.2 | length 620.9
  Bottom Layer w6: J2B.46 1065.83,-519.69
FREQB41: J1B.14 U4_B.2 | length 165.4
  Bottom Layer w6: J1B.14 1296.22,-1547.24
FREQB42: J2B.84 U14_B.4 | length 620.9
  Bottom Layer w6: J2B.84 1065.83,-70.87
FREQB43: J1B.54 U6_B.4 | length 165.4
  Bottom Layer w6: J1B.54 1296.22,-1074.8
FREQB44: J2B.48 U14_B.2 | length 620.9
  Bottom Layer w6: J2B.48 1065.83,-496.06
FREQB45: J1B.6 U5_B.1 | length 165.4
  Bottom Layer w6: J1B.6 1296.22,-1641.73
FREQB46: J2B.62 U15_B.3 | length 620.9
  Bottom Layer w6: J2B.62 1065.83,-330.71
FREQB47: J1B.42 U8_B.4 | length 165.4
  Bottom Layer w6: J1B.42 1296.22,-1216.54
FREQB48: J1B.87 J1B.88 J2B.34 U16_B.2 | length 866
  Bottom Layer w6: J2B.34 726.61,-661.42 750.24,-685.04 J1B.87 1027.72,-685.04 1039.53,-673.23 J1B.88 1296.22,-673.23
FREQB49: J1B.81 J1B.82 J2B.28 U13_B.1 | length 866
  Bottom Layer w6: J2B.28 726.61,-732.28 750.24,-755.91 J1B.81 1027.72,-755.91 1039.53,-744.09 J1B.82 1296.22,-744.09
FREQB50: J2B.70 U16_B.4 | length 620.9
  Bottom Layer w6: J2B.70 1065.83,-236.22
FREQB51: J1B.26 U7_B.3 | length 165.4
  Bottom Layer w6: J1B.26 1296.22,-1405.51
FREQB52: J1B.79 J1B.80 J2B.26 U15_B.1 | length 866
  Bottom Layer w6: J2B.26 726.61,-755.91 750.24,-779.53 J1B.79 1027.72,-779.53 1039.53,-767.72 J1B.80 1296.22,-767.72
FREQB53: J1B.4 U3_B.1 | length 165.4
  Bottom Layer w6: J1B.4 1296.22,-1665.35
FREQB54: J2B.68 U17_B.3 | length 620.9
  Bottom Layer w6: J2B.68 1065.83,-259.84
FREQB55: J1B.28 U5_B.3 | length 165.4
  Bottom Layer w6: J1B.28 1296.22,-1381.89
FREQB56: J1B.85 J1B.86 J2B.32 U17_B.1 | length 866
  Bottom Layer w6: J2B.32 726.61,-685.04 750.24,-708.66 J1B.85 1027.72,-708.66 1039.53,-696.85 J1B.86 1296.22,-696.85
FREQB57: J2B.72 U10_B.3 | length 620.9
  Bottom Layer w6: J2B.72 1065.83,-212.6
FREQB58: J1B.2@1130.87,-1688.98 U1_B.1 | length 165.4
  Bottom Layer w6: J1B.2@1130.87,-1688.98 1296.22,-1688.98
FREQB59: J1B.38 U3_B.3 | length 165.4
  Bottom Layer w6: J1B.38 1296.22,-1263.78
FREQB60: J1B.89 J1B.90 J2B.36 U10_B.1 | length 866
  Bottom Layer w6: J2B.36 726.61,-637.8 750.24,-661.42 J1B.89 1027.72,-661.42 1039.53,-649.61 J1B.90 1296.22,-649.61
FREQB61: J2B.56 U12_B.3 | length 620.9
  Bottom Layer w6: J2B.56 1065.83,-401.57
FREQB62: J1B.18 U8_B.2 | length 165.4
  Bottom Layer w6: J1B.18 1296.22,-1500
FREQB63: J1B.40 U1_B.3 | length 165.4
  Bottom Layer w6: J1B.40 1296.22,-1240.16
FREQB64: J1B.62 U12_B.1 | length 165.4
  Bottom Layer w6: J1B.62 1296.22,-980.31
FREQB65: J2B.58 U14_B.3 | length 620.9
  Bottom Layer w6: J2B.58 1065.83,-377.95
FREQB66: J1B.16 U6_B.2 | length 165.4
  Bottom Layer w6: J1B.16 1296.22,-1523.62
FREQB67: R1_B.1 U7_B.1
pads on no net: J1A.2@-61.02,90.55 J1A.67 J1A.68 J1A.69 J1A.70 J1A.71 J1A.72 J1A.73 J1A.74 J1A.75 J1A.76 J1A.77 J1A.78 J1A.79 J1A.80 J1A.81 J1A.82 J1A.83 J1A.84 J1A.85 J1A.86 J1A.87 J1A.88 J1A.89 J1A.90 J1B.2@847.4,-1791.34 J1B.67 J1B.68 J1B.69 J1B.70 J1B.71 J1B.72 J1B.73 J1B.74 J1B.75 J1B.76 J1B.77 J1B.78 J2A.2@624.96,-559.06 J2A.13 J2A.14 J2A.15 J2A.16 J2A.17 J2A.18 J2A.19 J2A.20 J2A.21 J2A.22 J2A.23 J2A.24 J2B.1 J2B.2 J2B.3 J2B.4 J2B.5 J2B.6 J2B.7 J2B.8 J2B.9 J2B.10 J2B.11 J2B.12 J2B.13 J2B.14 J2B.15 J2B.16 J2B.17 J2B.18 J2B.19 J2B.20 J2B.21 J2B.22 J2B.23 J2B.24 J3_A.3 J3_A.4 J3_A.5 J3_B.3 J3_B.4 J3_B.5 U1_A.0 U1_B.0 U2_A.0 U2_B.0 U3_A.0 U3_B.0 U4_A.0 U4_B.0 U5_A.0 U5_B.0 U6_A.0 U6_B.0 U7_A.0 U7_B.0 U8_A.0 U8_B.0 U9_A.0 U9_B.0 U10_A.0 U10_B.0 U11_A.0 U11_B.0 U12_A.0 U12_B.0 U13_A.0 U13_B.0 U14_A.0 U14_B.0 U15_A.0 U15_B.0 U16_A.0 U16_B.0 U17_A.0 U17_B.0
copper on no net: | length 2136.8
  Top Layer w6: v1(-131.89,-826.77) -84.65,-779.53 0,-779.53
  Signal Layer 1 w6: v1(-131.89,-826.77) -84.65,-779.53 -10,-779.53 -6.06,-783.46 212.13,-783.46 220,-791.34 1220,-791.34
  Signal Layer 2 w6: v1(811.97,-944.88) 835.59,-921.26 984.17,-921.26 1078.19,-921.26 1090,-933.07 1300,-933.07
  Bottom Layer w6: v1(811.97,-944.88) 835.59,-921.26 908.43,-921.26
  other v2: 1487.9,-1699.5 6429.9,-1699.5 1487.9,32.5 6429.9,32.5

## Polygon pours and split planes (outlines as drawn)
no net on Internal Plane 1 (split plane): 6528.8,-1798.41 -181.01,-1798.41 -181.01,130.4 6528.8,130.4
no net on Internal Plane 2 (split plane): 6528.8,-1798.41 -181.01,-1798.41 -181.01,130.4 6528.8,130.4

## Keep-outs
Keep-Out Layer:
  the board outline again, w5

## Dimensions
-201.1,150.5 to 6548.9,150.5 on Top Overlay
6548.9,-1818.5 to 6548.9,150.5 on Top Overlay
636.77,-1783.46 to -49.21,-1133.86 on Top Overlay
-49.21,-1133.86 to 636.77,-1783.46 on Top Overlay